# Altium PCB Amplifier_Board.PcbDoc
Units mm, origin at the board's own origin, x right, y up, seen from the top; angles counter-clockwise.
Board outline 110 x 60 mm, 2 copper layers (Top Layer, Bottom Layer); 167 components, 123 nets, 513 pads, 143 vias.
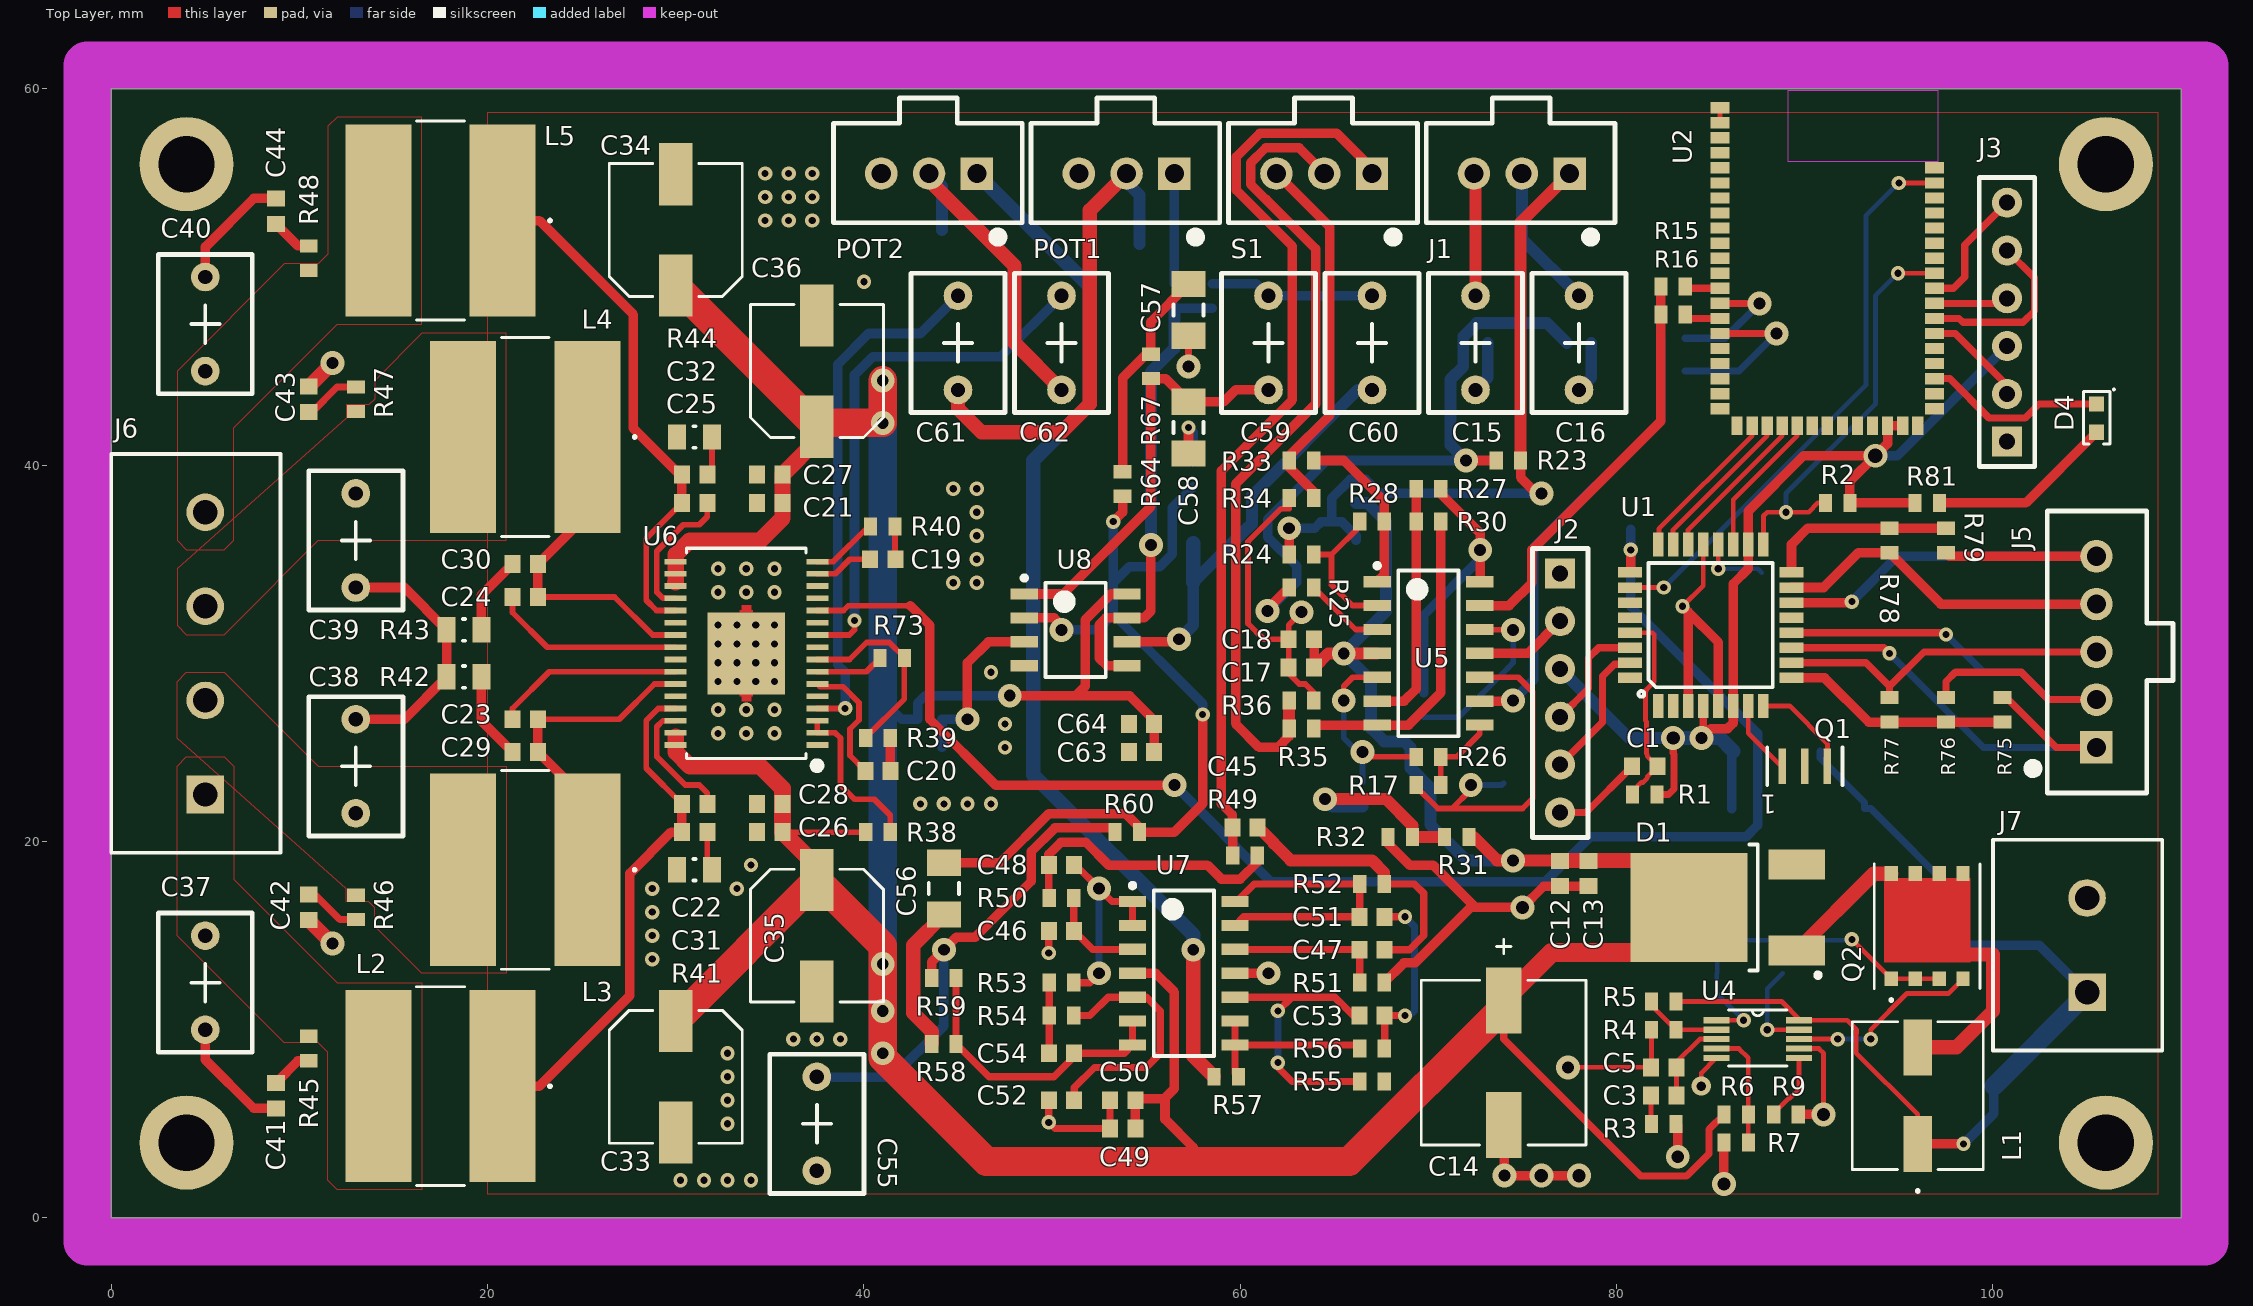
[diagram p0: Top Layer view]
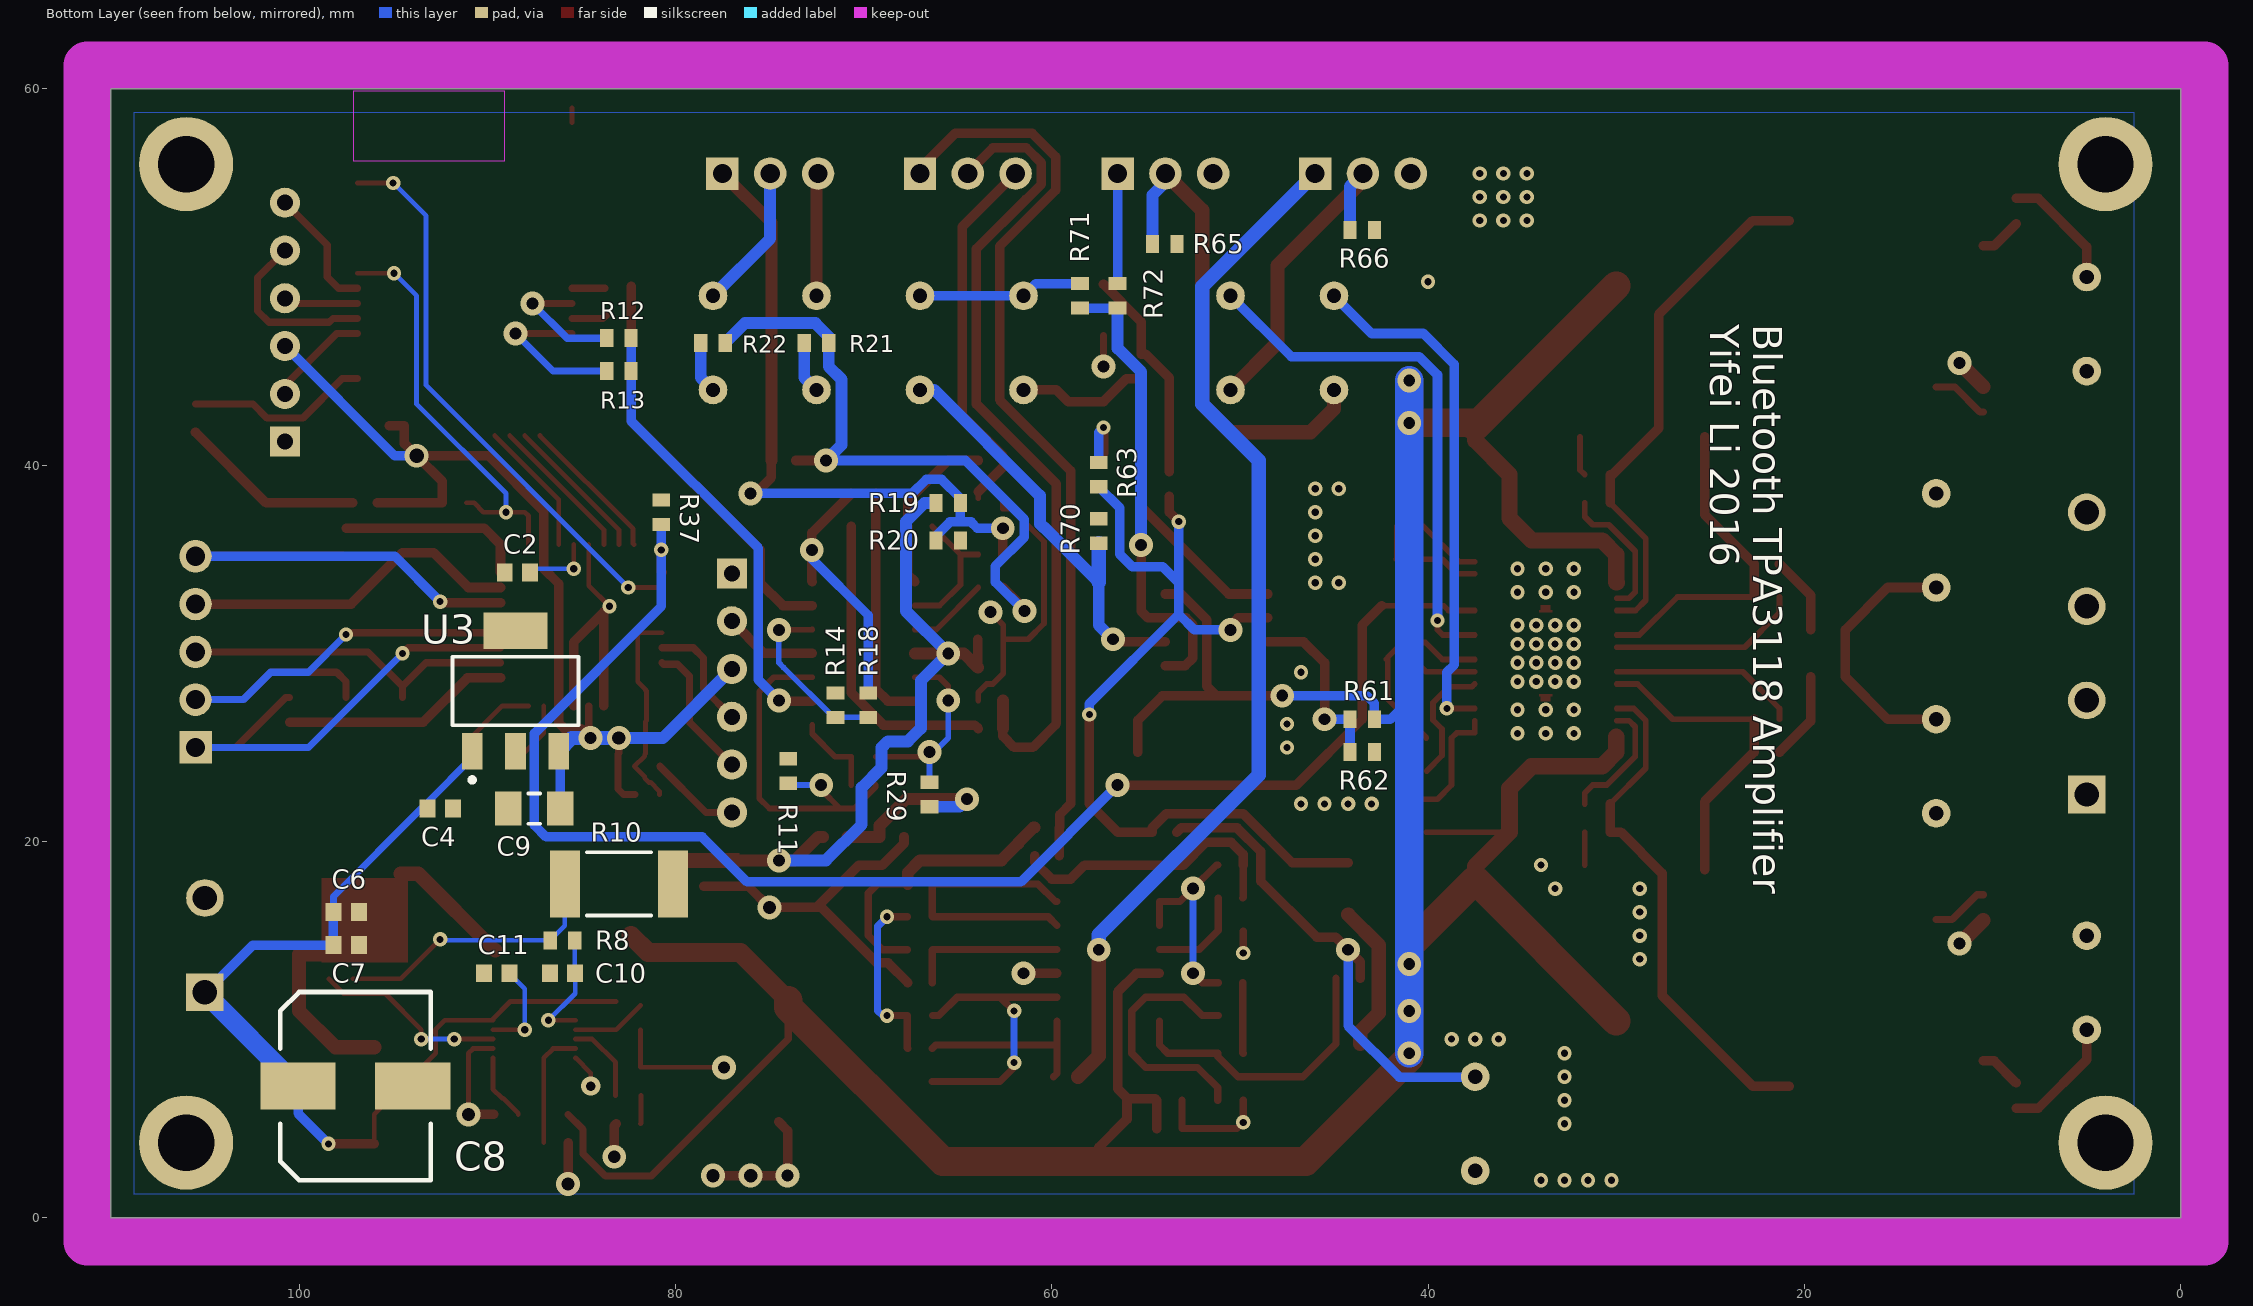
[diagram p1: Bottom Layer view, seen from below]

## Layer stack, top to bottom
Top Solder: solder mask 0.0102, Solder Resist, Dk 3.5
Top Layer: signal copper 0.0356
Dielectric 1: dielectric 0.32, FR-4, Dk 4.8
Bottom Layer: signal copper 0.0356
Bottom Solder: solder mask 0.0102, Solder Resist, Dk 3.5

## Board outline
0,0 110,0 110,60 0,60

## Design rules (kind name [scope] priority, off if disabled: settings)
Clearance [All] p1: gap=0.203 except(0.152: SMDPad-SMDPad)
Clearance Clearance_Big [All] p2 off: gap=0.254 except(0.203: SMDPad-SMDPad SMDPad-THPad SMDPad-Via SMDPad-Fill SMDPad-Poly SMDPad-Region SMDPad-Text THPad-THPad THPad-Via THPad-Fill THPad-Poly THPad-Region THPad-Text Region-Region Region-Text Text-Text; 0.381: Fill-Fill Fill-Poly Fill-Region Fill-Text Poly-Poly Poly-Region Poly-Text)
ComponentClearance [All] p1: gap=0.203 collisioncheckmode=3 verticalgap=0.254 showdistances=FALSE
HoleSize [All] p1: absolutevalues=TRUE maxlimit=6.731 minlimit=0.33 maxpercent=80.000 minpercent=20.000
MinimumAnnularRing [All] p1: minimumring=0.178
MinimumSolderMaskSliver [All] p1: minsoldermaskwidth=0.102
PolygonConnect PolygonConnect_BC127 [All vs InComponent('U2')] p1: connectstyle=Relief reliefconductorwidth=0.254 reliefentries=4 polygonreliefangle="90 Angle" airgapwidth=0.254
PolygonConnect PolygonConnect_TPA3118_Ground [All vs Name = ('U6-33')] p2: connectstyle=Direct reliefconductorwidth=0.254 reliefentries=4 polygonreliefangle="90 Angle" airgapwidth=0.254
PolygonConnect PolygonConnect_TPA3118_Pins [All vs InComponent('U6') and InNet('GND') and not (Name = ('U6-33'))] p3: connectstyle=Relief reliefconductorwidth=0.254 reliefentries=4 polygonreliefangle="90 Angle" airgapwidth=0.254
PolygonConnect PolygonConnect_Vias [All vs isVia] p4: connectstyle=Direct reliefconductorwidth=0.254 reliefentries=4 polygonreliefangle="90 Angle" airgapwidth=0.254
PolygonConnect [All] p5: connectstyle=Relief reliefconductorwidth=0.762 reliefentries=4 polygonreliefangle="90 Angle" airgapwidth=0.254
RoomDefinition Power_Supply [InComponentClass('Power_Supply')] p1 off: confinementstyle=ConfineIn formatcopy=TRUE lockcomponents=FALSE outline -25.4,-25.4 25.4,-25.4 25.4,0 -25.4,0
RoomDefinition Power_Section [InComponentClass('Power_Section')] p2 off: confinementstyle=ConfineIn formatcopy=TRUE lockcomponents=FALSE outline -25.4,-25.4 25.4,-25.4 25.4,0 -25.4,0
RoomDefinition Input_Section [InComponentClass('Input_Section')] p3 off: confinementstyle=ConfineIn formatcopy=TRUE lockcomponents=FALSE outline -25.4,-25.4 25.4,-25.4 25.4,0 -25.4,0
RoomDefinition ICs [InComponentClass('ICs')] p4 off: confinementstyle=ConfineIn formatcopy=TRUE lockcomponents=FALSE outline -25.4,-25.4 25.4,-25.4 25.4,0 -25.4,0
RoomDefinition Filter_Section [InComponentClass('Filter_Section')] p5 off: confinementstyle=ConfineIn formatcopy=TRUE lockcomponents=FALSE outline -25.4,-25.4 25.4,-25.4 25.4,0 -25.4,0
RoomDefinition Connectors [InComponentClass('Connectors')] p6 off: confinementstyle=ConfineIn formatcopy=TRUE lockcomponents=FALSE outline -25.4,-25.4 25.4,-25.4 25.4,0 -25.4,0
RoutingVias [All] p1: holewidth=0.635 width=1.27 viastyle="Through Hole" minholewidth=0.381 minwidth=0.762 maxholewidth=0.762 maxwidth=1.524
SolderMaskExpansion SolderMaskExpansion_Fine [IsPad and InComponent('U2')] p1 off: expansion=0.051
SolderMaskExpansion [All] p2: expansion=0.102
Width [All] p1: maxlimit=5.08 minlimit=0.203 preferedwidth=0.254
27 further rules are at their usual default settings.

## Classes and differential pairs
component class Power_Supply: C3 C4 C5 C6 C7 C8 C9 C10 C11 C12 C13 C14 D1 L1 Q2 R3 R4 R5 R6 R7 R8 R9 R10 U3 U4
component class Power_Section: C19 C20 C21 C22 C23 C24 C25 C26 C27 C28 C29 C30 C31 C32 C33 C34 C35 C36 C37 C38 C39 C40 C41 C42 C43 C44 L2 L3 L4 L5 R37 R38 R39 R40 R41 R42 R43 R44 R45 R46 R47 R48 R73 U6
component class Input_Section: C15 C16 C17 C18 J1 R11 R12 R13 R14 R15 R16 R17 R18 R19 R20 R21 R22 R23 R24 R25 R26 R27 R28 R29 R30 R31 R32 R33 R34 R35 R36 S1 U5
component class ICs: C1 C2 Q1 R1 R2 U1 U2
component class Filter_Section: C45 C46 C47 C48 C49 C50 C51 C52 C53 C54 C55 C56 C57 C58 C59 C60 C61 C62 C63 C64 POT1 POT2 R49 R50 R51 R52 R53 R54 R55 R56 R57 R58 R59 R60 R61 R62 R63 R64 R65 R66 R67 R70 R71 R72 U7 U8
component class Connectors: D4 J2 J3 J5 J6 J7 R75 R76 R77 R78 R79 R81

## Components (designator, comment, footprint, x,y, rotation, side; value= is the part's Value field where it differs from the comment)
C1 "0.1uF" CAPC1608X09N 81.5,24 r0 top
C2 "0.1uF" CAPC1608X09N 88.392,34.29 r180 bottom
C3 "0.18uF" CAPC1608X09N 82.5,6.5 r0 top
C4 "0.1uF" CAPC1608X09N 92.5,21.75 r0 bottom
C5 "0.01uF" CAPC1608X09N 82.5,8 r0 top
C6 "1uF" CAPC1608X09N 97.5,16.25 r0 bottom
C7 "1uF" CAPC1608X09N 97.5,14.5 r0 bottom
C8 "470uF" "NICHICON 8X10 CAP" 97,7 r180 bottom
C9 "10uF" CAPC3216X18N 87.5,21.75 r180 bottom
C10 "2200pF" CAPC1608X09N 86,13 r180 bottom
C11 "0.47uF" CAPC1608X09N 89.5,13 r0 bottom
C12 "1uF" CAPC1608X09N 77,18.3 r90 top
C13 "1uF" CAPC1608X09N 78.5,18.3 r90 top
C14 "100uF" PCAP_8X10-ELEC00 74,8.25 r270 top
C15 "1uF" "CAP RADIAL 5MM" 72.5,46.5 r270 top
C16 "1uF" "CAP RADIAL 5MM" 78,46.5 r270 top
C17 "10nF" CAPC1608X09N 63.25,29.25 r0 top
C18 "1uF" CAPC1608X09N 63.25,30.75 r180 top
C19 "47pF" CAPC1608X09N 41,35 r0 top
C20 "1uF" CAPC1608X09N 40.75,23.75 r180 top
C21 "1000pF" CAPC1608X09N 35,38 r0 top
C22 "0.22uF" CAPC1608X09N 31,22 r180 top
C23 "0.22uF" CAPC1608X09N 22,26.5 r0 top
C24 "0.22uF" CAPC1608X09N 22,33 r0 top
C25 "0.22uF" CAPC1608X09N 31,38 r180 top
C26 "1000pF" CAPC1608X09N 35,20.5 r0 top
C27 "0.1uF" CAPC1608X09N 35,39.5 r0 top
C28 "0.1uF" CAPC1608X09N 35,22 r0 top
C29 "330pF" CAPC1608X09N 22,24.75 r180 top
C30 "330pF" CAPC1608X09N 22,34.75 r180 top
C31 "330pF" CAPC1608X09N 31,20.5 r0 top
C32 "330pF" CAPC1608X09N 31,39.5 r0 top
C33 "47uF" CAP_EEFK_D 30,7.5 r270 top
C34 "47uF" CAP_EEFK_D 30,52.5 r90 top
C35 "47uF" CAP_EEFK_D 37.5,15 r270 top
C36 "47uF" CAP_EEFK_D 37.5,45 r90 top
C37 "0.68uF" "CAP RADIAL 5MM" 5,12.5 r90 top
C38 "0.68uF" "CAP RADIAL 5MM" 13,24 r90 top
C39 "0.68uF" "CAP RADIAL 5MM" 13,36 r90 top
C40 "0.68uF" "CAP RADIAL 5MM" 5,47.5 r90 top
C41 "0.01uF" CAPC1608X09N 8.75,6.5 r90 top
C42 "0.01uF" CAPC1608X09N 10.5,16.5 r270 top
C43 "0.01uF" CAPC1608X09N 10.5,43.5 r270 top
C44 "0.01uF" CAPC1608X09N 8.75,53.5 r90 top
C45 "2200pF" CAPC1608X09N 60.25,20.75 r0 top
C46 "2200pF" CAPC1608X09N 50.5,15.25 r0 top
C47 "2200pF" CAPC1608X09N 67,14.25 r180 top
C48 "4700pF" CAPC1608X09N 50.5,18.75 r0 top
C49 "10nF" CAPC1608X09N 53.75,4.75 r0 top
C50 "1uF" CAPC1608X09N 53.75,6.25 r0 top
C51 "2200pF" CAPC1608X09N 67,16 r0 top
C52 "2200pF" CAPC1608X09N 50.5,6.25 r0 top
C53 "2200pF" CAPC1608X09N 67,10.75 r180 top
C54 "4700pF" CAPC1608X09N 50.5,8.75 r0 top
C55 "0.39uF" "CAP RADIAL 5MM" 37.5,5 r90 top
C56 "0.068uF" CAPC3216X18N 44.25,17.5 r90 top
C57 "0.1uF" CAPC3216X18N 57.25,48.25 r270 top
C58 "0.068uF" CAPC3216X18N 57.25,42 r90 top
C59 "0.22uF" "CAP RADIAL 5MM" 61.5,46.5 r90 top
C60 "0.22uF" "CAP RADIAL 5MM" 67,46.5 r270 top
C61 "1uF" "CAP RADIAL 5MM" 45,46.5 r90 top
C62 "1uF" "CAP RADIAL 5MM" 50.5,46.5 r90 top
C63 "10nF" CAPC1608X09N 54.75,24.75 r0 top
C64 "1uF" CAPC1608X09N 54.75,26.25 r0 top
D1 "MBRD835LT4G" "ONSEMI DPAK-3" 87,16.5 r180 top
D4 "LED 0603" DIOM1608X08N 105.5,42.5 r270 top
J1 "3.5mm Audio Jack" 70543-0002 77.5,55.5 r180 top
J2 "6POS THRU HOLE 2.54MM" 90147-1106 77,34.25 r270 top
J3 "6POS THRU HOLE 2.54MM" 90147-1106 100.75,41.25 r90 top
J5 "5POS THRU HOLE 2.54MM" 70543-0004 105.5,25 r90 top
J6 "TERMINAL BLOCK 4POS" "TERMINAL BLOCK 5MM 4POS" 5,22.5 r90 top
J7 "TERMINAL BLOCK 2POS" "TERMINAL BLOCK 5MM 2POS" 105,12 r90 top
L1 "3.3uH" "IND_BOURNS_SRP00 - DUPLICATE" 96,6.5 r90 top
L2 "10uH" IND_BOURNS_SRN10 17.5,7 r180 top
L3 "10uH" IND_BOURNS_SRN10 22,18.5 r180 top
L4 "10uH" IND_BOURNS_SRN10 22,41.5 r180 top
L5 "10uH" IND_BOURNS_SRN10 17.5,53 r180 top
POT1 "Pot" 70543-0002 56.5,55.5 r180 top
POT2 "Pot" 70543-0002 46,55.5 r180 top
Q1 "8MHZ Resonator" "MURATA CSTCE8M00G52Z-R0" 90,24 r180 top
Q2 "CSD16321Q5_DQH_8" DQH8 96.5,15.5 r90 top
R1 "10k" RESC1608X06N 81.5,22.5 r0 top
R2 "10k" RESC1608X06N 91.75,38 r0 top
R3 "1.3K" RESC1608X06N 82.5,5 r180 top
R4 "45.3K" RESC1608X06N 82.5,10 r0 top
R5 "41.2k" RESC1608X06N 82.5,11.5 r0 top
R6 "8.45K" RESC1608X06N 86.35,5.5 r0 top
R7 "1k" RESC1608X06N 86.35,4 r0 top
R8 "100R" RESC1608X06N 86,14.75 r0 bottom
R9 "64.9K" RESC1608X06N 89,5.5 r180 top
R10 "0.004R" RESC6533X09N 83,17.75 r0 bottom
R11 "10k" RESC1608X06N 74,23.75 r270 bottom
R12 "1k" RESC1608X06N 83,46.75 r180 bottom
R13 "1k" RESC1608X06N 83,45 r180 bottom
R14 "10k" RESC1608X06N 71.5,27.25 r270 bottom
R15 "1k" RESC1608X06N 83,49.5 r180 top
R16 "1k" RESC1608X06N 83,48 r180 top
R17 "10k" RESC1608X06N 70,23 r0 top
R18 "10k" RESC1608X06N 69.75,27.25 r90 bottom
R19 "10k" RESC1608X06N 65.5,38 r0 bottom
R20 "10k" RESC1608X06N 65.5,36 r0 bottom
R21 "1k" RESC1608X06N 72.5,46.5 r180 bottom
R22 "1k" RESC1608X06N 78,46.5 r180 bottom
R23 "100K" RESC1608X06N 74.25,40.25 r180 top
R24 "10k" RESC1608X06N 63.25,35.25 r0 top
R25 "1k" RESC1608X06N 63.25,33.5 r0 top
R26 "10k" RESC1608X06N 70,24.5 r180 top
R27 "10k" RESC1608X06N 70,38.75 r180 top
R28 "10k" RESC1608X06N 67,37 r0 top
R29 "10k" RESC1608X06N 66.5,22.5 r270 bottom
R30 "10k" RESC1608X06N 70,37 r180 top
R31 "10k" RESC1608X06N 71.5,20.25 r0 top
R32 "10k" RESC1608X06N 68.5,20.25 r0 top
R33 "1k" RESC1608X06N 63.25,40.25 r180 top
R34 "100K" RESC1608X06N 63.25,38.25 r0 top
R35 "1k" RESC1608X06N 63.25,26 r180 top
R36 "100K" RESC1608X06N 63.25,27.5 r180 top
R37 "100K" RESC1608X06N 80.75,37.5 r270 bottom
R38 "100K" RESC1608X06N 40.75,20.5 r180 top
R39 "5.6K" RESC1608X06N 40.75,25.5 r0 top
R40 "4.7K" RESC1608X06N 41,36.75 r180 top
R41 "10R" RESC2012X06N 31,18.5 r180 top
R42 "10R" RESC2012X06N 18.75,28.75 r180 top
R43 "10R" RESC2012X06N 18.75,31.25 r180 top
R44 "10R" RESC2012X06N 31,41.5 r180 top
R45 "3.32R" RESC1608X06N 10.5,9 r90 top
R46 "3.32R" RESC1608X06N 13,16.5 r270 top
R47 "3.32R" RESC1608X06N 13,43.5 r270 top
R48 "3.32R" RESC1608X06N 10.5,51 r90 top
R49 "10k" RESC1608X06N 60.25,19.25 r0 top
R50 "10k" RESC1608X06N 50.5,17 r0 top
R51 "20K" RESC1608X06N 67,12.5 r180 top
R52 "10k" RESC1608X06N 67,17.75 r180 top
R53 "10k" RESC1608X06N 50.5,12.5 r180 top
R54 "10k" RESC1608X06N 50.5,10.75 r0 top
R55 "20K" RESC1608X06N 67,7.25 r0 top
R56 "10k" RESC1608X06N 67,9 r180 top
R57 "100R" RESC1608X06N 59.25,7.5 r180 top
R58 "13k" RESC1608X06N 44.25,9.25 r180 top
R59 "9K" RESC1608X06N 44.25,12.75 r180 top
R60 "9K" RESC1608X06N 54,20.5 r0 top
R61 "10k" RESC1608X06N 43.5,26.5 r180 bottom
R62 "10k" RESC1608X06N 43.5,24.75 r0 bottom
R63 "13k" RESC1608X06N 57.5,39.5 r90 bottom
R64 "35K" RESC1608X06N 53.75,39 r90 top
R65 "10k" RESC1608X06N 54,51.75 r0 bottom
R66 "10k" RESC1608X06N 43.5,52.5 r0 bottom
R67 "35K" RESC1608X06N 55.25,45.25 r270 top
R70 "30K" RESC1608X06N 57.5,36.5 r270 bottom
R71 "15K" RESC1608X06N 58.5,49 r270 bottom
R72 "100R" RESC1608X06N 56.5,49 r90 bottom
R73 "JUMPER" RESC1608X06N 41.5,29.75 r180 top
R75 "1M" RESC1608X06N 100.5,27 r90 top
R76 "1M" RESC1608X06N 97.5,27 r90 top
R77 "1M" RESC1608X06N 94.5,27 r90 top
R78 "1M" RESC1608X06N 94.5,36 r270 top
R79 "1M" RESC1608X06N 97.5,36 r270 top
R81 "470R" RESC1608X06N 96.5,38 r180 top
S1 "SPDT Switch" 70543-0002 67,55.5 r180 top
U1 "ATMEGA328P_TQFP" TQFP32-08 85,31.5 r90 top
U2 "BC127" BC127 85.5,59 r0 top
U3 "LM2937IMP-3.3/NOPB" DSO-G3/C6.4 88.5,28 r180 bottom
U4 "LM3481" VSSOP10 87.5,9.5 r0 top
U5 "OPA4134UA" SOIC127P600X175-14N 70,30 r0 top
U6 "TPA3116D2" DAP0032A 33.75,30 r180 top locked
U7 "OPA4134UA" SOIC127P600X175-14N 57,13 r0 top
U8 "OPA2134UA" SOIC127P600X175-8N 51.25,31.25 r0 top

## Footprints (in the part's own frame and the unit in brackets; to place one, negate y for a bottom-side part, rotate by r counter-clockwise, add the part's x,y. Pads: shape width x height; smd on the part's side, far side on the other; paste and mask are expansions set on the pad)
70543-0002 [mil] "Connector, Through-hole, 2.54mm Pitch"
  rect 67.99x67.99 hole 40: 1(0,0)
  round 67.99 hole 40: 2(100,0) 3(200,0)
  silkscreen extent -95,-158 300,143, body extent -98,-159 302,101, height 465
70543-0004 [mil] "Connector, Through-hole, 2.54mm Pitch"
  rect 67.99x67.99 hole 40: 1(0,0)
  round 67.99 hole 40: 2(100,0) 3(200,0) 4(300,0) 5(400,0)
  silkscreen extent -95,-160 495,143, body extent -100,-160 500,100, height 465
90147-1106 [mil] "Receptacle, 6POS, Through-hole, 2.54mm Pitch"
  rect 63x63 hole 33.46: 1(0,0)
  round 63 hole 33.46: 2(100,0) 3(200,0) 4(300,0) 5(400,0) 6(500,0)
  silkscreen extent -52,-58 553,58, body extent -50,-50 550,50, height 335
BC127 [mm]
  rect 1x0.6 smd mask+0: 1(0,0) 2(0,-0.8) 3(0,-1.6) 4(0,-2.4) 5(0,-3.2) 6(0,-4) 7(0,-4.8) 8(0,-5.6) 9(0,-6.4) 10(0,-7.2) 11(0,-8) 12(0,-8.8) 13(0,-9.6) 14(0,-10.4) 15(0,-11.2) 16(0,-12) 17(0,-12.8) 18(0,-13.6) 19(0,-14.4) 20(0,-15.2) 21(0,-16) 35(11.4,-16) 36(11.4,-15.2) 37(11.4,-14.4) 38(11.4,-13.6) 39(11.4,-12.8) 40(11.4,-12) 41(11.4,-11.2) 42(11.4,-10.4) 43(11.4,-9.6) 44(11.4,-8.8) 45(11.4,-8) 46(11.4,-7.2) 47(11.4,-6.4) 48(11.4,-5.6) 49(11.4,-4.8) 50(11.4,-4) 51(11.4,-3.2)
  rect 0.6x1 smd mask+0: 22(0.9,-16.9) 23(1.7,-16.9) 24(2.5,-16.9) 25(3.3,-16.9) 26(4.1,-16.9) 27(4.9,-16.9) 28(5.7,-16.9) 29(6.5,-16.9) 30(7.3,-16.9) 31(8.1,-16.9) 32(8.9,-16.9) 33(9.7,-16.9) 34(10.5,-16.9)
  Keep-Out Layer region: 3.6,-2.85 11.6,-2.85 11.6,0.9 3.6,0.9
"CAP RADIAL 5MM" [mil]
  round 60 hole 30: 1(-98.43,0) 2(98.43,0)
  silkscreen extent -146,-98 146,98
CAP_EEFK_D [mil]
  rect 130x70 smd: 1(-116.5,0) 2(116.5,0)
  silkscreen extent -139,-139 139,139, body extent -153,-134 154,134, height 242
CAPC1608X09N [mm] "Chip Capacitor, 2-Leads, Body 1.60x0.80mm, IPC Medium Density"
  rect 0.85x0.95 smd: 1(-0.675,0) 2(0.675,0)
  body extent -0.85,-0.45 0.85,0.45, height 0.9
CAPC3216X18N [mm] "Chip Capacitor, 2-Leads, Body 3.20x1.60mm, IPC Medium Density"
  rect 1.4x1.8 smd: 1(-1.375,0) 2(1.375,0)
  silkscreen extent -0.3,-0.8 0.3,0.8, body extent -1.68,-0.87 1.67,0.87, height 1.8
DAP0032A [mil]
  rect 46x12 smd paste-4 mask+2: 1(-148.5,191.93) 2(-148.5,166.34) 3(-148.5,140.75) 4(-148.5,115.16) 5(-148.5,89.57) 6(-148.5,63.98) 7(-148.5,38.39) 8(-148.5,12.8) 9(-148.5,-12.8) 10(-148.5,-38.39) 11(-148.5,-63.98) 12(-148.5,-89.57) 13(-148.5,-115.16) 14(-148.5,-140.75) 15(-148.5,-166.34) 16(-148.5,-191.93) 17(148.5,-191.93) 18(148.5,-166.34) 19(148.5,-140.75) 20(148.5,-115.16) 21(148.5,-89.57) 22(148.5,-63.98) 23(148.5,-38.39) 24(148.5,-12.8) 25(148.5,12.8) 26(148.5,38.39) 27(148.5,63.98) 28(148.5,89.57) 29(148.5,115.16) 30(148.5,140.75) 31(148.5,166.34) 32(148.5,191.93)
  rect 161.81x171.65 smd paste-4 mask+2: 33(0,0)
  Top Layer region: 13.78,89.76 13.78,85.83 -13.78,85.83 -13.78,89.76 -9.84,89.76 -9.84,100.39 9.84,100.39 9.84,89.76
  Top Layer region: 13.78,-89.76 13.78,-85.83 -13.78,-85.83 -13.78,-89.76 -9.84,-89.76 -9.84,-100.39 9.84,-100.39 9.84,-89.76
  silkscreen extent -156,-220 125,243, body extent -160,-217 160,217, height 43
DIOM1608X08N [mm] "Molded Diode, 2-Leads, Body 1.60x0.80mm, IPC Medium Density"
  rect 0.8x0.8 smd: 1(-0.75,0) 2(0.75,0)
  silkscreen extent -1.57,-0.69 1.38,0.97, body extent -0.8,-0.4 0.8,0.4, height 0.8
DQH8 [mil]
  rect 31x28 smd paste-14: 1(-110,75) 2(-110,25) 3(-110,-25) 4(-110,-75) 5(110,-75) 6(110,-25) 7(110,25) 8(110,75)
  Top Layer region: -75,90 -75,75 -75,-75 -75,-90 100,-90 100,90
  silkscreen extent -157,-111 130,111
DSO-G3/C6.4 [mm] "SOT-223/SC-73; 4 Leads; Body 6.7 x 7.3 mm, inc. leads (LxW max)"
  rect 1.1x1.95 smd: 1(-2.3,-3.2) 2(0,-3.2) 3(2.3,-3.2)
  rect 3.4x1.95 smd: 4(0,3.2)
  silkscreen extent -3.35,-4.85 3.35,1.83
IND_BOURNS_SRN10 [mil]
  rect 138x402 smd: 1(-130,0) 2(130,0)
  silkscreen extent -232,-208 50,208, body extent -199,-203 199,203, height 236
"IND_BOURNS_SRP00 - DUPLICATE" [mil]
  rect 117x59 smd: 1(-101,0) 2(101,0)
  silkscreen extent -202,-137 154,137, body extent -149,-132 150,132, height 126
"MURATA CSTCE8M00G52Z-R0" [mm]
  rect 0.4x1.9 smd: 1(1.2,0) 2(0,0) 3(-1.2,0)
  silkscreen extent -2,-1 2,1
"NICHICON 8X10 CAP" [mm]
  rect 4x2.5 smd: 1(-3.05,0) 2(3.05,0)
  silkscreen extent -4,-5 4,5
"ONSEMI DPAK-3" [mm]
  rect 3x1.6 smd: 1(-2.58,2.285) 3(-2.58,-2.285)
  rect 6.2x5.8 smd: 4(3.15,0)
  silkscreen extent -3.83,-3.35 -0.05,3.72
PCAP_8X10-ELEC00 [mil]
  rect 138x75 smd: 1(-130,0) 2(130,0)
  silkscreen extent -258,-173 173,173, body extent -183,-167 183,168, height 407
RESC1608X06N [mm] "Chip Resistor, 2-Leads, Body 1.55x0.85mm, IPC Medium Density"
  rect 0.7x0.95 smd: 1(-0.65,0) 2(0.65,0)
  body extent -0.8,-0.48 0.8,0.48, height 0.55
RESC2012X06N [mm] "Chip Resistor, 2-Leads, Body 2.00x1.25mm, IPC Medium Density"
  rect 0.95x1.35 smd: 1(-0.925,0) 2(0.925,0)
  silkscreen extent -0.05,-0.58 0.05,0.58, body extent -1.05,-0.67 1.05,0.67, height 0.6
RESC6533X09N [mm] "Chip Resistor, 2-Leads, Body 6.45x3.35mm, IPC Medium Density"
  rect 1.6x3.55 smd: 1(-2.875,0) 2(2.875,0)
  silkscreen extent -1.7,-1.68 1.7,1.68, body extent -3.32,-1.78 3.32,1.78, height 0.9
SOIC127P600X175-8N [mm] "SOIC, 8-Leads, Body 4.90x3.90mm, Pitch 1.27mm, IPC Medium Density"
  rect 1.45x0.6 smd: 1(-2.725,1.905) 2(-2.725,0.635) 3(-2.725,-0.635) 4(-2.725,-1.905) 5(2.725,-1.905) 6(2.725,-0.635) 7(2.725,0.635) 8(2.725,1.905)
  silkscreen extent -2.85,-2.5 1.6,2.88, body extent -2,-2.5 2,2.5, height 1.75
SOIC127P600X175-14N [mm] "SOIC, 14-Leads, Body 8.65x3.90mm, Pitch 1.27mm, IPC Medium Density"
  rect 1.45x0.6 smd: 1(-2.725,3.81) 2(-2.725,2.54) 3(-2.725,1.27) 4(-2.725,0) 5(-2.725,-1.27) 6(-2.725,-2.54) 7(-2.725,-3.81) 8(2.725,-3.81) 9(2.725,-2.54) 10(2.725,-1.27) 11(2.725,0) 12(2.725,1.27) 13(2.725,2.54) 14(2.725,3.81)
  silkscreen extent -2.85,-4.4 1.6,4.78, body extent -2,-4.4 2,4.4, height 1.75
"TERMINAL BLOCK 5MM 2POS" [mm]
  rect 2x2 hole 1.3: 1(0,0)
  round 2 hole 1.3: 2(5,0)
  silkscreen extent -3.1,-4 8.1,5
"TERMINAL BLOCK 5MM 4POS" [mm]
  rect 2x2 hole 1.3: 1(0,0)
  round 2 hole 1.3: 2(5,0) 3(10,0) 4(15,0)
  silkscreen extent -3.1,-4 18.1,5
TQFP32-08 [mil]
  rect 50x22 smd mask+2: 1(-169,110.24) 2(-169,78.74) 3(-169,47.24) 4(-169,15.75) 5(-169,-15.75) 6(-169,-47.24) 7(-169,-78.74) 8(-169,-110.24) 17(169,-110.24) 18(169,-78.74) 19(169,-47.24) 20(169,-15.75) 21(169,15.75) 22(169,47.24) 23(169,78.74) 24(169,110.24)
  rect 22x50 smd mask+2: 9(-110.24,-169) 10(-78.74,-169) 11(-47.24,-169) 12(-15.75,-169) 13(15.75,-169) 14(47.24,-169) 15(78.74,-169) 16(110.24,-169) 25(110.24,169) 26(78.74,169) 27(47.24,169) 28(15.75,169) 29(-15.75,169) 30(-47.24,169) 31(-78.74,169) 32(-110.24,169)
  silkscreen extent -150,-130 130,151
VSSOP10 [mil] "DGS (S-PDS0-G10"
  rect 54x13 smd mask+1: 1(-86.5,39.37) 2(-86.5,19.68) 3(-86.5,0) 4(-86.5,-19.69) 5(-86.5,-39.37) 6(86.5,-39.37) 7(86.5,-19.69) 8(86.5,0) 9(86.5,19.68) 10(86.5,39.37)
  silkscreen extent -61,-56 61,61, body extent -97,-59 97,59, height 42

## Part data
C1 C2 C4 C27 C28: library part "CAP CER 0.1uF 0603"
C3: library part "CAP CER 0.18uF 0603"
C5 C41 C42 C43 C44: library part "CAP CER 0.01uF 0603"
C6 C7 C12 C13 C18 C20 C50 C64: library part "CAP CER 1uF 0603"
C8: library part "CAP ALUM 470uF SMD"
C9: library part "CAP CER 10uF 1206", "3V3 filter cap"
C10 C45 C46 C47 C51 C52 C53: library part "CAP CER 2200pF 0603"
C11: library part "CAP CER 0.47uF 0603"
C14: library part "CAP ALUM 100uF SMD"
C15 C16 C61 C62: library part "CAP 1uF Radial 5mm", "Audio coupling cap"
C17 C49 C63: library part "CAP CER 10nF 0603", "Bypass caps"
C19: library part "CAP CER 47pF 0603"
C21 C26: library part "CAP CER 1000pF 0603"
C22 C23 C24 C25: library part "CAP CER 0.22uF 0603"
C29 C30 C31 C32: library part "CAP CER 330pF 0603"
C33 C34 C35 C36: library part "CAP ALUM 47uF SMD"
C37 C38 C39 C40: library part "CAP 0.68uF Radial 5mm", "Output Cap"
C48 C54: library part "CAP CER 4700pF 0603"
C55: library part "CAP 0.39uF Radial 5mm", "Film cap in LT"
C56 C58: library part "CAP CER 0.068uF 1206"
C57: library part "CAP CER 0.1uF 1206", "LT capacitor"
C59 C60: library part "CAP 0.22uF Radial 5mm", "Film cap in crossover"
D1: "SHOTTKEY 35V 8A"
L1: library part "IND 3.3µH 7A SMD"
L2 L3 L4 L5: library part "IND 10uH 5A SMD"
Q1: library part "RESONATOR 8MHZ"
R1 R2 R11 R14 R17 R18 R19 R20 R24 R26 R27 R28 R29 R30 R31 R32 R49 R50 R52 R53 R54 R56 R61 R62 R65 R66: library part "RES 10K 0603"
R3: library part "RES 1.3K 0603"
R4: library part "RES 45.3K 0603"
R5: library part "RES 41.2K 0603"
R6: library part "RES 8.45K 0603"
R7 R12 R13 R15 R16 R21 R22 R25 R33 R35: library part "RES 1K 0603"
R8 R57 R72: library part "RES 100R 0603"
R9: library part "RES 64.9K 0603"
R10: library part "RES 0.004R 2512"
R23 R34 R36 R37 R38: library part "RES 100K 0603"
R39: library part "RES 5.6K 0603"
R40: library part "RES 4.7K 0603"
R41 R42 R43 R44: library part "RES 10R 0805"
R45 R46 R47 R48: library part "RES 3.32R 0603"
R51 R55: library part "RES 20K 0603"
R58 R63: library part "RES 13K 0603"
R59 R60: library part "RES 9K 0603"
R64 R67: library part "RES 35K 0603"
R70: library part "RES 30K 0603"
R71: library part "RES 15K 0603"
R73: library part "RES JUMPER 0603"
R75 R76 R77 R78 R79: library part "RES 1M 0603"
R81: library part "RES 470R 0603"
U4: "IC REG CTRLR MULT TOP 10MSOP"
U5 U7: "Quad OPAx134 Operational Amplifier"
U8: library part OPA2134UA/2K5

## Free pads (board coordinates)
  round 5 hole 3: 0(4,4) 0(4,56) 0(106,4) 0(106,56)

## Via types
v1: diameter 0.762, hole 0.381, Top Layer to Bottom Layer, tented both sides, 96 vias
v2: diameter 1.27, hole 0.635, Top Layer to Bottom Layer, tented both sides, 38 vias
v3: diameter 1.27, hole 0.686, Top Layer to Bottom Layer, tented both sides, 4 vias
v4: diameter 1.27, hole 0.711, Top Layer to Bottom Layer, tented both sides, 3 vias
v5: diameter 1.27, hole 0.762, Top Layer to Bottom Layer, tented both sides, 1 vias
v6: diameter 1.016, hole 0.508, Top Layer to Bottom Layer, tented both sides, 1 vias

## Nets (pads, with @x,y where several pads share a name; then routed paths per layer and width w, separated by ;. In a path a pad name is that pad's centre, name@x,y a point inside that pad or via, vN(x,y) a via of type N, cw(c..) or ccw(c..) an arc to the next point about the centre after c; other vN are vias at no path point)
3V3: C9.2 J2.3 J3.3 R1.2 R2.2 R81.2 U1.4 U1.6 U1.18 U2.32 U2.33 U3.3 | length 59.5
  Top Layer w0.381: R1.2 82.75,22.5 83.044,22.795 83.044,24.659 83.006,24.697 v4@83.006,25.494 ; v2@84.6,25.6 U1.4
  Top Layer w0.508: v4(83,25.5) v4@83.006,25.494 ; v2@84.6,25.6 85,26 85.9,26 86.2,26.3 U1.6 86.2,33.7 87,34.5 U1.18 87,37.56 89.94,40.5 v5(93.75,40.5) ; U2.33 U2.32 94.4,41.15 v5(93.75,40.5) ; R81.2 R2.2 92.4,39.15 v5(93.75,40.5)
  Bottom Layer w0.508: C9.2 86.125,24.725 U3.3 ; v5(93.75,40.5) 94.92,40.5 J3.3
  Bottom Layer w0.635: J2.3 80.67,25.5 v4(83,25.5)
  Bottom Layer w0.762: v4(83,25.5) v2(84.5,25.5) 85.5,25.5 U3.3
BACK: U1.19 U2.26 | length 7.2
  Top Layer w0.254: U1.19 86.2,38.17 89.6,41.571
BC127_CTS: J3.2 U2.40 | length 5.4
  Top Layer w0.381: U2.40 98,47 100.75,44.25 J3.2
BC127_LN: R15.1 U2.13 | length 1.7
  Top Layer w0.381: R15.1@83.75,49.4 U2.13
BC127_LP: R12.1 U2.14 | length 6.8
  Top Layer w0.381: U2.14 v2(87.6,48.6)
  Bottom Layer w0.381: R12.1 85.75,46.75 v2(87.6,48.6)
BC127_OUT: R35.2 R36.2 S1.2 | length 43.4
  Top Layer w0.508: R35.2 62.6,25.6 62,25 61,25 59.786,26.214 59.786,26.255 59.75,26.291 59.75,39 64,43.25 64,51.5 61.372,54.128 61.352,54.128 60.548,54.932 60.548,56.068 61.352,56.872 63.122,56.872 64.46,55.533 S1.2
  Top Layer w0.635: R35.2 R36.2
BC127_RESET: R2.1 U1.17 U2.44 | length 22.2
  Top Layer w0.254: U1.17 87.8,37.3 88,37.5 v1(89,37.5) 90.2,37.5 90.7,38 R2.1 ; v1(94.95,50.2) U2.44
  Bottom Layer w0.254: v1(89,37.5) 89,38.5 93.75,43.25 93.75,49 v1(94.95,50.2)
BC127_RN: R16.1 U2.15 | length 1.9
  Top Layer w0.381: R16.1 83.85,47.8 U2.15
BC127_RP: R13.1 U2.16 | length 8.7
  Top Layer w0.381: U2.16 v2(88.5,47)
  Bottom Layer w0.381: R13.1 86.5,45 v2(88.5,47)
BC127_RTS: J3.6 U2.43 | length 6.7
  Top Layer w0.381: U2.43 97.9,49.4 98.5,50 98.5,51.7 J3.6
BC127_RX: J3.4 U2.42 | length 4
  Top Layer w0.381: U2.42 100.48,48.6 J3.4
BC127_TX: J3.5 U2.41 | length 9.4
  Top Layer w0.381: U2.41 98.2,47.8 98.4,47.6 101.6,47.6 102.2,48.2 102.2,49.96 J3.5
BUFFERED_HIGH: C62.2 U6.10 | length 28.4
  Top Layer w0.305: U6.10 39.225,30.975 39.5,31.25 v1(39.5,31.75)
  Bottom Layer w0.508: v1(39.5,31.75) 39.5,44.796 40.474,45.77 47.27,45.77 C62.2
BUFFERED_LOW: C61.2 U6.4 | length 27.8
  Top Layer w0.305: U6.4 v1(39,27.075)
  Bottom Layer w0.508: v1(39,27.075) 39,29 38.611,29.389 38.611,45.361 40.25,47 43,47 C61.2
CAP_DRIVE_1: R75.1 R76.1 R77.1 U1.9 | length 12.2
  Top Layer w0.508: U1.9 91.05,28.7 93.4,26.35 R77.1 R76.1 R75.1
CAP_DRIVE_2: R78.1 R79.1 U1.16 | length 10.1
  Top Layer w0.508: U1.16 89.293,35.793 90.15,36.65 R78.1 R79.1
CAP_RTN_1A: J5.1 R75.2 U1.11 | length 24.5
  Top Layer w0.381: U1.11 94.2,30.3 v1(94.5,30) ; R75.2 100.711,27.65 103.361,25 J5.1
  Bottom Layer w0.381: v1(94.5,30) 99.5,25 J5.1
CAP_RTN_1B: J5.2 R76.2 U1.12 | length 27.3
  Top Layer w0.381: U1.12 97.4,31.1 v1(97.5,31) ; R76.2 97.5,28.5 98,29 101.5,29 102.96,27.54 J5.2
  Bottom Layer w0.381: v1(97.5,31) 99.5,29 101.5,29 102.96,27.54 J5.2
CAP_RTN_1C: J5.3 R77.2 U1.10 | length 18.1
  Top Layer w0.381: U1.10 93.25,29.5 94.5,28.25 ; R77.2 94.5,28.25 ; J5.3 96.33,30.08 94.5,28.25
CAP_RTN_2A: J5.4 R78.2 U1.15 | length 18.1
  Top Layer w0.508: U1.15 91,33.5 92.85,35.35 R78.2 97.23,32.62 J5.4
CAP_RTN_2B: J5.5 R79.2 U1.14 | length 25
  Top Layer w0.508: U1.14 92.45,32.7 v1(92.5,32.75) ; R79.2@97.69,35.16 J5.5
  Bottom Layer w0.508: v1(92.5,32.75) 94.91,35.16 J5.5
CROSSOVER_IN: C45.1 R49.1 S1.1 | length 49
  Top Layer w0.508: R49.1 59.6,20.725 C45.1 59.575,21.425 58.988,22.012 58.988,39.692 62.77,43.474 62.77,51.633 59.786,54.616 59.786,56.384 61.036,57.634 65.134,57.634 67,55.767 S1.1
DTR: C1.1 J2.6 | length 4.8
  Top Layer w0.381: J2.6 78.375,21.55 C1.1
FORWARD: U1.22 U2.25 | length 7.8
  Top Layer w0.254: U1.22 83.8,36.571 88.8,41.571
GND: C2.1 C4.1 C5.1 C6.1 C7.1 C8.2 C9.1 C10.1 C11.2 C12.1 C13.1 C14.2 C17.1 C18.2 C19.1 C20.1 C21.1 C26.1 C27.1 C28.1 C33.2 C34.2 C35.2 C36.2 C37.1 C38.2 C39.1 C40.2 C41.1 C42.2 C43.1 C44.2 C46.1 C49.1 C50.1 C52.1 C55.1 C57.2 C63.1 C64.1 J2.1 J2.2 J3.1 J7.2 pad.0 POT1.3 POT2.3 Q1.2 R3.1 R4.1 R7.1 R9.1 R10.1 R11.1 R14.1 R20.1 R32.1 R34.1 R36.1 R37.1 R39.2 R41.2 R42.2 R43.2 R44.2 R51.1 R55.2 R62.1 R65.1 R66.1 R70.1 U1.3 U1.5 U1.21 U2.1 U2.2 U2.3 U2.4 U2.7 U2.8 U2.9 U2.10 U2.11 U2.17 U2.18 U2.19 U2.20 U2.21 U2.22 U2.27 U3.2 U3.4 U4.5 U4.7 U5.11 U6.1 U6.5 U6.9 U6.11 U6.13 U6.14 U6.15 U6.22 U6.25 U6.28 U6.33 U7.11 U8.4 | length 127.2
  Top Layer w0.254: v2(77.413,8) C5.1 81.85,8.025 R4.1 ; v1(83.5,32.5) 84.6,33.6 U1.21 ; v6(84.5,7) 84.5,7.697 U4.5 ; U2.2 U2.1 ; U4.7 90.75,9 91,8.75 v3(91,5.5)
  Top Layer w0.305: U6.15 38.475,34.225 39.25,35 C19.1 ; R34.1 62.6,37.691 62.169,37.691 60.416,35.938 60.416,31.584 61.25,30.75 C18.2 ; v2(63.25,32.187) 62.575,31.512 C18.2 ; R36.1 63.9,27.925 63.456,28.369 63.131,28.369 62.575,28.925 C17.1 C18.2
  Top Layer w0.381: C52.1 v1(49.825,5.075) 50.15,4.75 C49.1 C50.1 ; v1(49.825,14.075) C46.1 ; v2(57.25,45.25) C57.2
  Top Layer w0.508: C37.1 5,8.4 7.575,5.825 C41.1 ; C40.2 5,51.6 7.575,54.175 C44.2 ; C38.2 15.575,26.5 R42.2 R43.2 15.575,33.5 C39.1 ; R39.2 41.4,23.775 C20.1 ; U7.11 v2(61.5,13) ; R51.1 68.702,13.551 69.289,13.551 72.238,16.5 72.5,16.5 ; R32.1 67.85,19.9 69,18.75 70.25,18.75 72.5,16.5 ; U5.11 75.29,30 J2.2 ; C14.2@74.5,5.098 74.034,4.632 v2(74.034,2.25) v4(76,2.25) v4(78,2.25) ; C13.1 C12.1 76.125,17.625 v3(75,16.5) 72.5,16.5 ; R3.1 83.25,4.9 v3(83.25,3.25) ; v1(83.5,32.5) 83.8,32.2 ; U1.3 83.8,32.2 ; U1.5 85.4,30.6 83.8,32.2 ; v3(85.7,1.8) R7.1 ; R9.1 v3(91,5.5)
  Top Layer w0.762: C42.2 v2(11.75,14.575) ; C43.1 v2(11.75,45.425) ; POT2.3@40.879,55.459 POT2.3
  other v1: 30.25,2 31.5,2 32.75,2 34,2 32.75,5 32.75,6.25 32.75,7.5 32.75,8.75 36.25,9.5 37.5,9.5 38.75,9.5 28.75,13.75 28.75,15 28.75,16.25 28.75,17.5 33.25,17.5 34,18.75 43,22 44.25,22 45.5,22 46.75,22 47.5,25 32.25,25.75 33.75,25.75 35.25,25.75 47.5,26.25 32.25,27 33.75,27 35.25,27 32.25,28.5 33.25,28.5 34.25,28.5 35.25,28.5 46.75,29 32.25,29.5 33.25,29.5 34.25,29.5 35.25,29.5 32.25,30.5 33.25,30.5 34.25,30.5 35.25,30.5 32.25,31.5 33.25,31.5 34.25,31.5 35.25,31.5 32.25,33.25 33.75,33.25 35.25,33.25 44.75,33.75 46,33.75 32.25,34.5 33.75,34.5 35.25,34.5 46,35 46,36.25 46,37.5 44.75,38.75 46,38.75 40,49.75 34.75,53 36,53 37.25,53 34.75,54.25 36,54.25 37.25,54.25 34.75,55.5 36,55.5 37.25,55.5
HIGH: POT2.1 R57.2 | length 55.7
  Top Layer w0.762: v2(57.5,14.25) 57.5,8.6 R57.2
  Bottom Layer w0.762: POT2.1 52,49.5 52,43.25 49,40.25 49,23.54 57.5,15.04 v2(57.5,14.25)
JACK_BUFFERED_OUT: R33.2 R34.2 S1.3 | length 19.9
  Top Layer w0.305: R33.2@62.6,39.9 R33.2 ; R34.2 R34.2@63.9,38.6
  Top Layer w0.508: S1.3 64.762,52.658 64.762,42.655 62.6,40.493 R33.2 ; R33.2@62.6,39.9 R34.2@63.9,38.6
LOW: POT1.1 R72.2 | length 5.9
  Bottom Layer w0.508: R72.2 POT1.1
MUTE: R37.2 U1.25 U6.12 | length 80.1
  Top Layer w0.305: U6.12 38.911,32.275 39.174,32.537 42.463,32.537
  Top Layer w0.508: 42.463,32.537 43.5,31.5 43.5,26.5 47,23 v2(56.5,23) ; U1.25 80.75,34.343 v1(80.75,35.5)
  Bottom Layer w0.508: v2(56.5,23) 61.643,17.857 76.189,17.857 78.582,20.25 86.872,20.25 87.5,20.878 87.5,23.628 87.493,23.636 87.493,25.751 80.75,32.493 v1(80.75,35.5) R37.2@80.75,36.6
NetC1_2: C1.2 R1.1 U1.29 | length 10.9
  Top Layer w0.254: U1.29 81.9,31.1 82,31 82,28.5 81.59,28.09 81.59,28.051 81.54,28 81.54,26.415 81.59,26.364 81.59,24.674 81.631,24.633 81.631,24.544 C1.2 81.631,23.456 81.631,23.367 81.408,23.144 81.319,23.144 80.85,22.675 R1.1
NetC2_2: C2.2 U1.20 | length 3.7
  Top Layer w0.254: v1(85.4,34.5) U1.20
  Bottom Layer w0.254: v1(85.4,34.5) 87.507,34.5 C2.2
NetC3_1: C3.1 R3.2 | length 1.5
  Top Layer w0.254: C3.1 81.825,5.025 R3.2
NetC3_2: C3.2 C5.2 U4.3 | length 4.4
  Top Layer w0.254: C3.2 C5.2 83.175,8.262 84.413,9.5 U4.3
NetC10_2: C10.2 R8.1 U4.1 | length 6.5
  Top Layer w0.254: U4.1 v1(86.75,10.5)
  Bottom Layer w0.254: C10.2 85.325,11.925 v1(86.75,10.5) ; C10.2@85.35,13.025 R8.1@85.35,15
NetC11_1: C11.1 U4.9 | length 5
  Top Layer w0.254: v1(88,10) U4.9
  Bottom Layer w0.254: v1(88,10) 88,12.175 C11.1
NetC15_1: C15.1 J1.3 | length 6.5
  Top Layer w0.635: J1.3 72.5,55.42 C15.1
NetC15_2: C15.2 R21.1 | length 2.8
  Bottom Layer w0.635: C15.2 73.15,44.65 R21.1
NetC16_1: C16.1 J1.2 | length 7.8
  Bottom Layer w0.635: J1.2 74.96,52.04 C16.1
NetC16_2: C16.2 R22.1 | length 2.8
  Bottom Layer w0.635: C16.2 78.65,44.65 R22.1
NetC19_2: C19.2 R40.1 | length 1.8
  Top Layer w0.305: R40.1 41.65,35.025 C19.2
NetC20_2: C20.2 U6.6 | length 6.8
  Top Layer w0.305: U6.6 37.664,28.233 38.884,28.233 39.737,27.38 39.737,26.464 39.258,25.986 39.258,24.567 C20.2
NetC22_1: C22.1 U6.30 | length 6.8
  Top Layer w0.305: U6.30 29.317,26.425 28.988,26.096 28.988,24.512 30.5,23 31.25,23 31.675,22.575 C22.1
NetC22_2: C22.2 C31.1 L2.1 U6.29 | length 27.5
  Top Layer w0.305: U6.29 29.075,27.075 28.429,26.429 28.429,23.896 C22.2
  Top Layer w0.508: L2.1 22.75,7 27.563,11.813 27.563,18.313 29.75,20.5 C31.1 C22.2
NetC23_1: C23.1 U6.26 | length 10
  Top Layer w0.305: C23.1 21.325,27.075 23.275,29.025 U6.26
NetC23_2: C23.2 C29.1 L3.1 U6.27 | length 17.2
  Top Layer w0.305: C23.2 27,26.5 28.875,28.375 U6.27
  Top Layer w0.508: C23.2 C29.1 25.302,22.123 L3.1
NetC24_1: C24.1 U6.24 | length 10.2
  Top Layer w0.305: C24.1 21.325,32.175 23.175,30.325 U6.24
NetC24_2: C24.2 C30.1 L4.1 U6.23 | length 17.7
  Top Layer w0.305: C24.2 26.75,33 28.775,30.975 U6.23
  Top Layer w0.508: C24.2 C30.1 25.302,37.377 L4.1
NetC25_1: C25.1 U6.20 | length 7.5
  Top Layer w0.305: U6.20 29.317,32.925 28.988,33.254 28.988,35.423 30.403,36.838 31.25,36.838 31.675,37.263 C25.1
NetC25_2: C25.2 C32.1 L5.1 U6.21 | length 27.9
  Top Layer w0.305: U6.21 28.975,32.275 28.429,32.821 28.429,36.104 C25.2
  Top Layer w0.508: L5.1 22.75,53 27.75,48 27.75,41.957 30.207,39.5 C32.1 C25.2
NetC29_2: C29.2 R42.1 | length 4.7
  Top Layer w0.508: R42.1 19.675,26.4 C29.2
NetC30_2: C30.2 R43.1 | length 4.2
  Top Layer w0.508: R43.1 19.675,33.1 C30.2
NetC31_2: C31.2 R41.1 | length 1.7
  Top Layer w0.305: R41.1@31.675,18.75 C31.2
NetC32_2: C32.2 R44.1 | length 2.1
  Top Layer w0.305: C32.2 31.925,39.75 R44.1
NetC41_2: C41.2 R45.1 | length 2.2
  Top Layer w0.508: C41.2 9.925,8.35 R45.1
NetC42_1: C42.1 R46.2 | length 3
  Top Layer w0.381: C42.1 10.825,17.175 12.15,15.85 R46.2
NetC43_2: C43.2 R47.1 | length 3
  Top Layer w0.381: C43.2 10.679,42.825 12.004,44.15 R47.1
NetC44_1: C44.1 R48.2 | length 2.2
  Top Layer w0.508: C44.1 9.925,51.65 R48.2
NetC45_2: C45.2 C47.1 R52.1 | length 15.3
  Top Layer w0.381: R52.1 69.25,17.75 69.75,17.25 69.75,15 69,14.25 C47.1
  Top Layer w0.635: C45.2 60.961,20.75 61.771,19.941 61.771,19.904 62.675,19 67,19 67.65,18.35 R52.1
NetC46_2: C46.2 R50.2 U7.3 | length 5.3
  Top Layer w0.381: R50.2 51.15,15.275 C46.2 52.155,14.27 U7.3
NetC47_2: C47.2 R51.2 U7.12 | length 8.4
  Top Layer w0.381: U7.12 66.305,14.27 C47.2 66.35,14.225 R51.2
NetC48_1: C48.1 R49.2 R50.1 | length 15.2
  Top Layer w0.381: C48.1 49.825,17.025 R50.1
  Top Layer w0.508: C48.1 49.825,19.325 50.464,19.964 51.786,19.964 53,18.75 58.25,18.75 59,18 60,18 60.9,18.9 R49.2
NetC48_2: C48.2 R53.1 U7.1 U7.2 | length 11.2
  Top Layer w0.381: R53.1 52,12.5 v2(52.5,13) ; C48.2 51.25,18.75 v2(52.5,17.5) 53.19,16.81 U7.1 U7.2
  Bottom Layer w0.381: v2(52.5,13) v2(52.5,17.5)
NetC51_1: C51.1 R52.2 U7.13 U7.14 | length 15.6
  Top Layer w0.381: U7.13 60.185,16 C51.1 66.35,16.025 R52.2 60.738,17.75 59.798,16.81 U7.14
NetC51_2: C51.2 C53.1 R56.1 | length 9.7
  Top Layer w0.381: R56.1 67.675,9.025 C53.1 v1(68.75,10.75) ; C51.2 v1(68.75,16)
  Bottom Layer w0.381: v1(68.75,10.75) 69,10.75 69.25,11 69.25,15.5 v1(68.75,16)
NetC52_2: C52.2 R54.2 U7.5 | length 13.6
  Top Layer w0.381: R54.2 52,10.75 52.98,11.73 U7.5 55.02,11.73 55.75,11 55.75,8.75 55,8 52.25,8 51.175,6.925 C52.2
NetC53_2: C53.2 R55.1 U7.10 | length 15.7
  Top Layer w0.381: U7.10 62.73,11.73 ; v1(62,8.25) 62,8 62.75,7.25 R55.1 ; v1(62,11) 62.73,11.73 ; C53.2 66,10.75 65.02,11.73 62.73,11.73
  Bottom Layer w0.381: v1(62,8.25) v1(62,11)
NetC54_1: C54.1 R53.2 R54.1 | length 3.8
  Top Layer w0.381: C54.1 49.85,8.775 R53.2
NetC54_2: C54.2 R58.1 R59.1 U7.6 U7.7 | length 15.7
  Top Layer w0.381: R59.1 R58.1 46.65,7.5 50.104,7.5 51.175,8.571 C54.2 53.835,8.75 U7.7 U7.6
NetC55_2: C55.2 R59.2 R60.1 | length 26.5
  Top Layer w0.508: R59.2 43.6,13.6 v2(44.25,14.25) 44.917,14.917 45.917,14.917 48.892,17.892 48.892,19.47 50.148,20.726 53.124,20.726 R60.1
  Bottom Layer w0.508: C55.2 37.5,7.48 41.526,7.48 44.25,10.204 v2(44.25,14.25)
NetC56_1: C56.1 R58.2 | length 8
  Top Layer w0.762: R58.2 43.6,9.9 42.615,10.885 42.615,14.49 C56.1
NetC56_2: C56.2 R60.2 R63.1 R64.1 U8.2 | length 47.8
  Top Layer w0.508: C56.2 47.22,18.875 49.833,21.488 53.905,21.488 54.65,20.743 R60.2 56.5,20.5 58,22 58,24.25 ; U8.2 50.115,31.885 50.5,31.5 v2(50.5,31.25) ; v1(53.25,37) 53.75,37.5 R64.1 ; 58,24.274 v1(58,26.75)
  Bottom Layer w0.508: v2(50.5,31.25) 52.422,31.25 53.25,32.078 ; v1(53.25,37) 53.25,33.75 ; R63.1 56.393,37.743 56.393,35.277 55.723,34.607 54.107,34.607 53.25,33.75 ; v1(58,26.75) 58,27.328 53.25,32.078 ; 53.25,32.078 53.25,33.75
NetC57_1: C57.1 R64.2 R67.1 | length 11.6
  Top Layer w0.508: R64.2 53.75,44.643 55.007,45.9 R67.1 55.25,47.625 C57.1
NetC58_1: C58.1 R63.2 | length 3.3
  Top Layer w0.508: C58.1 v1(57.25,42)
  Bottom Layer w0.508: v1(57.25,42) 57.5,41.75 R63.2
NetC58_2: C58.2 C59.1 R67.2 U8.1 | length 22.5
  Top Layer w0.508: U8.1 50.59,33.155 55.25,37.815 R67.2 56.025,44.6 C58.2 59.125,43.375 59.75,44 C59.1
NetC59_2: C59.2 C60.1 R71.1 | length 8.8
  Bottom Layer w0.508: R71.1 60.85,49.65 C59.2 C60.1
NetC60_2: C60.2 R70.2 U8.6 | length 22.9
  Top Layer w0.508: U8.6 56.615,30.615 v2(56.75,30.75)
  Bottom Layer w0.635: v2(56.75,30.75) 57.5,31.5 57.5,33.784 60.435,36.718 60.468,36.718 60.631,36.882 60.631,38.381 66.25,44 C60.2
  Bottom Layer w0.762: 57.5,33.784 R70.2
NetC61_1: C61.1 POT1.2 R65.2 | length 26.2
  Top Layer w0.762: C61.1 45,43 46.25,41.75 50.5,41.75 52,43.25 52,53.54 POT1.2
  Bottom Layer w0.635: POT1.2 53.96,55.04 54.65,54.35 R65.2
NetC62_1: C62.1 POT2.2 R66.2 | length 17.7
  Top Layer w0.762: POT2.2 43.46,55.145 48,50.605 48,46.5 C62.1
  Bottom Layer w0.635: POT2.2 44.15,54.81 R66.2
NetD1_1: D1.1 L1.2 Q2.5 Q2.6 Q2.7 Q2.8 | length 18.8
  Top Layer w0.762: D1.1 93.659,18.294 Q2.8 ; L1.2 98.065,9.065 100,11 100,14 98.5,14 96.5,16
NetD4_2: D4.2 R81.1 | length 9.9
  Top Layer w0.508: R81.1 101.75,38 D4.2
NetJ1_1: J1.1 R19.1 R20.2 R23.1 R24.1 | length 37.5
  Top Layer w0.508: R24.1 v2(62.6,36.65) ; R23.1 74.9,39.35 75.75,38.5 v2(76,38.5)
  Top Layer w0.635: R23.1 74.9,52.9 J1.1
  Bottom Layer w0.508: v2(62.6,36.65) 63.957,36.65 64.29,36.983 64.85,36.983 ; R20.2 66.15,36.243 65.41,36.983 64.85,36.983 ; v2(76,38.5) 67.417,38.5 66.667,39.25 65.857,39.25 64.85,38.243 R19.1 64.85,36.983
NetQ1_1: Q1.1 U1.7 | length 4
  Top Layer w0.254: U1.7 87,25.75 Q1.1@88.8,23.95
NetQ1_3: Q1.3 U1.8 | length 5.4
  Top Layer w0.254: U1.8 89.193,27.207 91.2,25.2 Q1.3
NetQ2_1: Q2.1 Q2.2 Q2.3 R8.2 R10.2 | length 14.7
  Top Layer w0.25: v1(92.5,14.801) Q2.1 Q2.2 Q2.3
  Bottom Layer w0.25: R10.2 85.875,15.525 R8.2 92.449,14.75 v1(92.5,14.801)
NetQ2_4: Q2.4 U4.8 | length 10.3
  Top Layer w0.254: U4.8 v1(91.75,9.5) ; v1(93.5,9.5) 93.5,10 95.431,11.931 97.648,11.931 98.405,12.688 Q2.4
  Bottom Layer w0.254: v1(91.75,9.5) v1(93.5,9.5)
NetR4_2: R4.2 R5.1 U4.2 | length 4
  Top Layer w0.254: R5.1@81.85,11.3 R4.2 U4.2
NetR6_2: R6.2 R7.2 U4.4 | length 6.4
  Top Layer w0.254: U4.4 86.5,9 87,8.5 R6.2 R7.2
NetR9_2: R9.2 U4.6 | length 3.6
  Top Layer w0.254: R9.2 88.35,5.564 89.142,6.356 89.206,6.356 89.697,6.847 U4.6
NetR11_2: R11.2 R17.1 U5.10 | length 19.3
  Top Layer w0.305: R17.1 69.35,22.9 70.5,21.75 71.25,21.75 ; v2(72.25,23) 72.25,22.75 71.25,21.75 ; U5.10 74.77,28.73 75.541,27.959 75.541,22.291 75,21.75 71.25,21.75
  Bottom Layer w0.305: v2(72.25,23) 73.9,23 R11.2
NetR12_2: R12.2 R13.2 U5.9 | length 24.3
  Top Layer w0.508: U5.9 74.46,27.46 v2(74.5,27.5)
  Bottom Layer w0.508: v2(74.5,27.5) 75.592,28.592 75.592,35.592 82.35,42.35 R13.2 R12.2
NetR14_2: R14.2 R18.1 U5.12 | length 9.5
  Top Layer w0.305: U5.12 72.745,31.25 v2(74.5,31.25)
  Bottom Layer w0.305: R18.1 R14.2 71.6,26.6 74.25,29.25 ; 74.25,29.25 74.5,29.5 v2(74.5,31.25)
NetR15_2: R15.2 R16.2 U5.13 | length 21.9
  Top Layer w0.508: U5.13 74.29,32.54 75.5,33.75 75.5,35.5 82.35,42.35 R16.2 R15.2
NetR17_2: R17.2 R26.1 U5.8 | length 4.5
  Top Layer w0.305: R17.2 R26.1 71.5,24.5 72.725,25.725 U5.8
NetR18_2: R18.2 R27.1 U5.14 | length 14.4
  Top Layer w0.508: R27.1@70.65,38.5 72.75,36.4 v2(72.75,35.5) 72.75,33.835 U5.14
  Bottom Layer w0.508: R18.2 69.75,32.025 72.75,35.025 v2(72.75,35.5)
NetR21_2: R21.2 R22.2 R23.2 R25.1 | length 34.8
  Top Layer w0.508: v2(61.457,32.25) 61.457,32.357 R25.1 ; v2(72,40.25) R23.2
  Bottom Layer w0.508: v2(61.457,32.25) 63,33.793 63,34.634 61.457,36.177 61.457,37.123 64.584,40.25 v2(72,40.25)
  Bottom Layer w0.635: v2(72,40.25) 71.166,41.084 71.166,44.552 71.85,45.236 R21.2 71.85,46.833 72.563,47.547 76.303,47.547 R22.2
NetR24_2: R24.2 R28.1 U5.2 | length 7.6
  Top Layer w0.305: R24.2 64.85,35.25 ; R28.1@66.35,36.75 64.85,35.25 ; U5.2 65.96,32.54 64.85,33.65 64.85,35.25
NetR25_2: R25.2 U5.3 | length 4.3
  Top Layer w0.305: R25.2 66.13,31.27 U5.3
NetR26_2: R26.2 R29.1 U5.5 | length 10.6
  Top Layer w0.305: v2(65.5,27.5) 65.5,28.25 65.98,28.73 U5.5 ; v2(66.5,24.75) 66.75,24.5 R26.2
  Bottom Layer w0.305: v2(65.5,27.5) 65.5,25.5 66.25,24.75 v2(66.5,24.75) R29.1
NetR27_2: R27.2 R30.2 U5.6 | length 12.7
  Top Layer w0.508: U5.6 68.71,27.46 69.35,28.1 69.35,36.75 R27.2@69.35,38.5
NetR28_2: R28.2 R33.1 U5.1 | length 9.1
  Top Layer w0.305: R28.2@67.65,36.75 R28.2
  Top Layer w0.508: R33.1 65.5,40.25 67.65,38.1 R28.2 ; U5.1 67.65,34.185 R28.2@67.65,36.75
NetR29_2: R29.2 R31.1 R32.2 | length 9.7
  Top Layer w0.635: v2(64.5,22.25) 67.75,22.25 69.15,20.85 R32.2 R31.1
  Bottom Layer w0.635: v2(64.5,22.25) 64.9,21.85 R29.2
NetR30_1: R30.1 R35.1 U5.7 | length 16.4
  Top Layer w0.508: R35.1 64.09,26.19 U5.7 68.94,26.19 70.65,27.9 R30.1@70.65,36.75
NetR38_1: R38.1 U6.2 U6.3 | length 8.7
  Top Layer w0.305: U6.3 U6.2 38.475,25.775 38.75,25.5 38.75,23 39.5,22.25 40.55,22.25 41.4,21.4 R38.1
NetR39_1: R39.1 R73.1 U6.8 | length 10.5
  Top Layer w0.305: U6.8 39.239,29.675 40.144,30.581 41.347,30.581 R73.1@42.15,29.778 ; R39.1 40.1,25.528 42.15,27.578 R73.1 R73.1@42.206,29.694
NetR40_2: R40.2 U6.16 | length 3.6
  Top Layer w0.305: U6.16 38.375,34.875 40.25,36.75 R40.2
NetR56_2: R56.2 R57.1 U7.8 U7.9 | length 9.7
  Top Layer w0.381: U7.9 U7.8 ; R57.1 59.725,7.675 U7.8 ; R56.2 66.16,9.19 U7.8
NetR61_1: R61.1 R62.2 U8.3 | length 9.3
  Top Layer w0.508: v2(45.5,26.5) 45.5,29.5 46.615,30.615 U8.3
  Bottom Layer w0.508: R62.2@44.15,25 R61.1 v2(45.5,26.5)
NetR71_2: R71.2 R72.1 U8.5 U8.7 | length 25.1
  Top Layer w0.508: U8.5 52.905,29.345 52.5,29.75 52.5,31.52 52.865,31.885 U8.7 54.885,31.885 55.25,32.25 v2(55.25,35.75)
  Bottom Layer w0.508: R72.1 R71.2
  Bottom Layer w0.635: v2(55.25,35.75) 55.25,44.956 56.5,46.206 R72.1
NetR73_2: R73.2 U6.7 | length 3.6
  Top Layer w0.305: U6.7 40.125,29.025 R73.2
OUT_HIGH_N: C40.1 J6.4 L5.2 R48.1
OUT_HIGH_P: C39.2 J6.3 L4.2 R47.2
OUT_LOW_N: C38.1 J6.2 L3.2 R46.1
OUT_LOW_P: C37.2 J6.1 L2.2 R45.2
PLAY/PAUSE: U1.26 U2.50 | length 30.4
  Top Layer w0.254: U1.26 v1(82.5,33.5) ; v1(95,55) U2.50
  Bottom Layer w0.254: v1(82.5,33.5) 93.25,44.25 93.25,53.25 v1(95,55)
RED_LED: D4.1 U2.37 | length 9.8
  Top Layer w0.381: U2.37 97.7,44.6 99.8,42.5 101.7,42.5 102.45,43.25 D4.1
RX-I: J2.5 U1.31 | length 7.4
  Top Layer w0.381: J2.5 79.25,26.34 79.25,28.786 79.888,29.424 80.631,29.424 U1.31
SCL: U1.28
SDA: U1.27
TX-O: J2.4 U1.30 | length 6.2
  Top Layer w0.381: J2.4 78.5,28.13 78.5,29.75 79.05,30.3 U1.30
VBAT: C4.2 C6.2 C7.2 C8.1 J7.1 L1.1 R5.2 U3.1 U4.10 | length 52.3
  Top Layer w0.254: R5.2 88.769,11.5 U4.10@89.769,10.5 ; U4.10 U4.10@89.769,10.5 ; L1.1 96,5.5 92.738,8.762 92.738,9.816 92.75,9.828 92.75,10 92.25,10.5 U4.10@89.769,10.5
  Top Layer w0.508: L1.1 v1(98.435,3.935)
  Bottom Layer w0.381: U3.1 90.8,24.45 93.175,22.075 C4.2 93.5,21.75 98.175,17.075 C6.2
  Bottom Layer w0.508: C6.2 C7.2 102.45,14.5 J7.1@105,11.95 ; v1(98.435,3.935) 100.05,5.55 C8.1
  Bottom Layer w1.016: C8.1 J7.1@105,11.95
VOL_DOWN: U1.23 U2.24 | length 7.8
  Top Layer w0.254: U1.23 83,36.571 88,41.571
VOL_UP: U1.24 U2.23 | length 7.8
  Top Layer w0.254: U1.24 82.25,35.843 82.25,36.621 87.2,41.571
VSUPPLY: C12.2 C13.2 C14.1 C17.2 C18.1 C21.2 C26.2 C27.2 C28.2 C33.1 C34.1 C35.1 C36.1 C49.2 C50.2 C63.2 C64.2 D1.4 R6.1 R19.2 R31.2 R38.2 R61.2 U5.4 U6.17 U6.18 U6.19 U6.31 U6.32 U7.4 U8.8 | length 250.6
  Top Layer w0.305: C26.2 R38.2
  Top Layer w0.381: C14.1@74.5,11.302 74,10.802 74,9.5 81.279,2.221 83.721,2.221 84.905,3.405 84.905,4.706 R6.1
  Top Layer w0.508: v2(47.75,27.75) 51.25,27.75 ; U8.8 53.129,33.155 51.75,31.776 51.75,28.25 51.25,27.75 ; U7.4 55.5,13 56.5,12 56.5,6.866 56,6.366 56,6.325 ; C49.2 C50.2 ; C50.2@54.5,6.325 56,6.325 ; C63.2 C64.2 55.425,26.447 54.122,27.75 51.25,27.75 ; 57.5,3 57.5,3.75 56,5.25 56,6.325 ; C17.2 C18.1
  Top Layer w0.635: C17.2 64.675,30 v2(65.5,30) U5.4 ; R31.2 72.4,20.25 73.65,19 v2(74.5,19) 76.975,19 C12.2
  Top Layer w0.864: 29.978,33.763 30,33.785 30,35.25 30.75,36 34.5,36 35.675,37.175 C21.2 C27.2 37.5,41.325 C36.1
  Top Layer w0.889: 30,25.552 30,24.75 30.75,24 34.5,24 35.675,22.825 C28.2 C26.2 37.5,18.675 C35.1
  Top Layer w1.016: C14.1 76.548,14.1 81.45,14.1 D1.4@82.35,15
  Top Layer w1.524: C33.1 C35.1 41,14.459 v2(41,13.5) v2(41,11) v2(41,8.75) 41,8.5 46.5,3 57.5,3 65.798,3 74,11.202 C14.1 ; C34.1 C36.1 ; C36.1@37.5,42.25 C36.1 ; v2(41,44.5) v2(41,42.25) 37.709,42.25 C36.1
  Bottom Layer w0.508: 41.25,27.5 41,27.5 42,26.5 R61.2 42.85,27.35 43.25,27.75 v2(47.75,27.75)
  Bottom Layer w0.635: R19.2 66.75,38 67.75,37 67.75,32.25 v2(65.5,30) 66.954,28.547 66.954,26.013 67.645,25.322 68.712,25.322 69.047,24.987 69.047,23.92 70.102,22.864 70.102,20.898 72,19 v2(74.5,19)
  Bottom Layer w1.524: v2(41,8.75) v2(41,11) v2(41,13.5) 41,27.5 v2(41,42.25) v2(41,44.5)
pads on no net: D1.3 U1.1 U1.2 U1.13 U1.32 U2.5 U2.6 U2.12 U2.28 U2.29 U2.30 U2.31 U2.34 U2.35 U2.36 U2.38 U2.39 U2.45 U2.46 U2.47 U2.48 U2.49 U2.51

## Polygon pours and split planes (outlines as drawn)
GND on Top Layer "GND" (solid, shelved, pour order 20): 20,58.75 108.75,58.75 108.75,1.25 20,1.25
OUT_HIGH_P on Top Layer "OUT_HIGH_P" (solid, shelved, pour order 14): 21,47 16.5,47 14,44.5 14,43.517 13.683,43.2 12.5,43.2 12.5,42.5 3.5,34.5 3.5,31.5 4,31 6,31 6.5,31.5 11,36 16.5,36 21,36
OUT_LOW_N on Top Layer "OUT_LOW_N" (solid, shelved, pour order 12): 21,13 16.5,13 14,15.5 14,16.483 13.683,16.8 12.5,16.8 12.5,17.5 3.5,25.5 3.5,28.5 4,29 6,29 6.5,28.5 11,24 16.5,24 21,24
OUT_HIGH_N on Top Layer "OUT_HIGH_N" (solid, shelved, pour order 10): 16.5,58.5 12,58.5 11.5,58 11.5,51.2 11,50.7 9.2,50.7 3.5,45 3.5,36 4,35.5 5,35.5 6,35.5 6.5,36 6.5,42 12,47.5 16.5,47.5
OUT_LOW_P on Top Layer "OUT_LOW_P" (solid, shelved, pour order 6): 16.5,1.5 12,1.5 11.5,2 11.5,8.8 11,9.3 9.2,9.3 3.5,15 3.5,24 4,24.5 5,24.5 6,24.5 6.5,24 6.5,18 12,12.5 16.5,12.5
GND on Bottom Layer "GND_Bottom" (solid, shelved, pour order 24): 108.75,58.75 2.5,58.75 2.5,1.25 108.75,1.25 108.75,58.75

## Keep-outs
Keep-Out Layer:
  lines w2.54: -1.27,-1.27 111.25,-1.27 111.25,61.25 -1.27,61.25 -1.27,-1.27

## Other copper
Top Layer:
  rectangle net VSUPPLY: 76.6,18.6 80.8,19.4

## Silkscreen, mask and mechanical layers (free items; w line width, h text height)
Bottom Overlay:
  text "Bluetooth TPA3118 Amplifier / Yifei Li 2016" at 25,47.5 h1.52 r90

## Text inside footprints (layer, text, board x,y; h text height)
Q1: Top Overlay "1" at 88.5,22.5 h1 r180
U4: Mechanical 1 "*" at 85.049,11.554 h1.27